# EAGLE board sdcard (EAGLE 6.5.0)
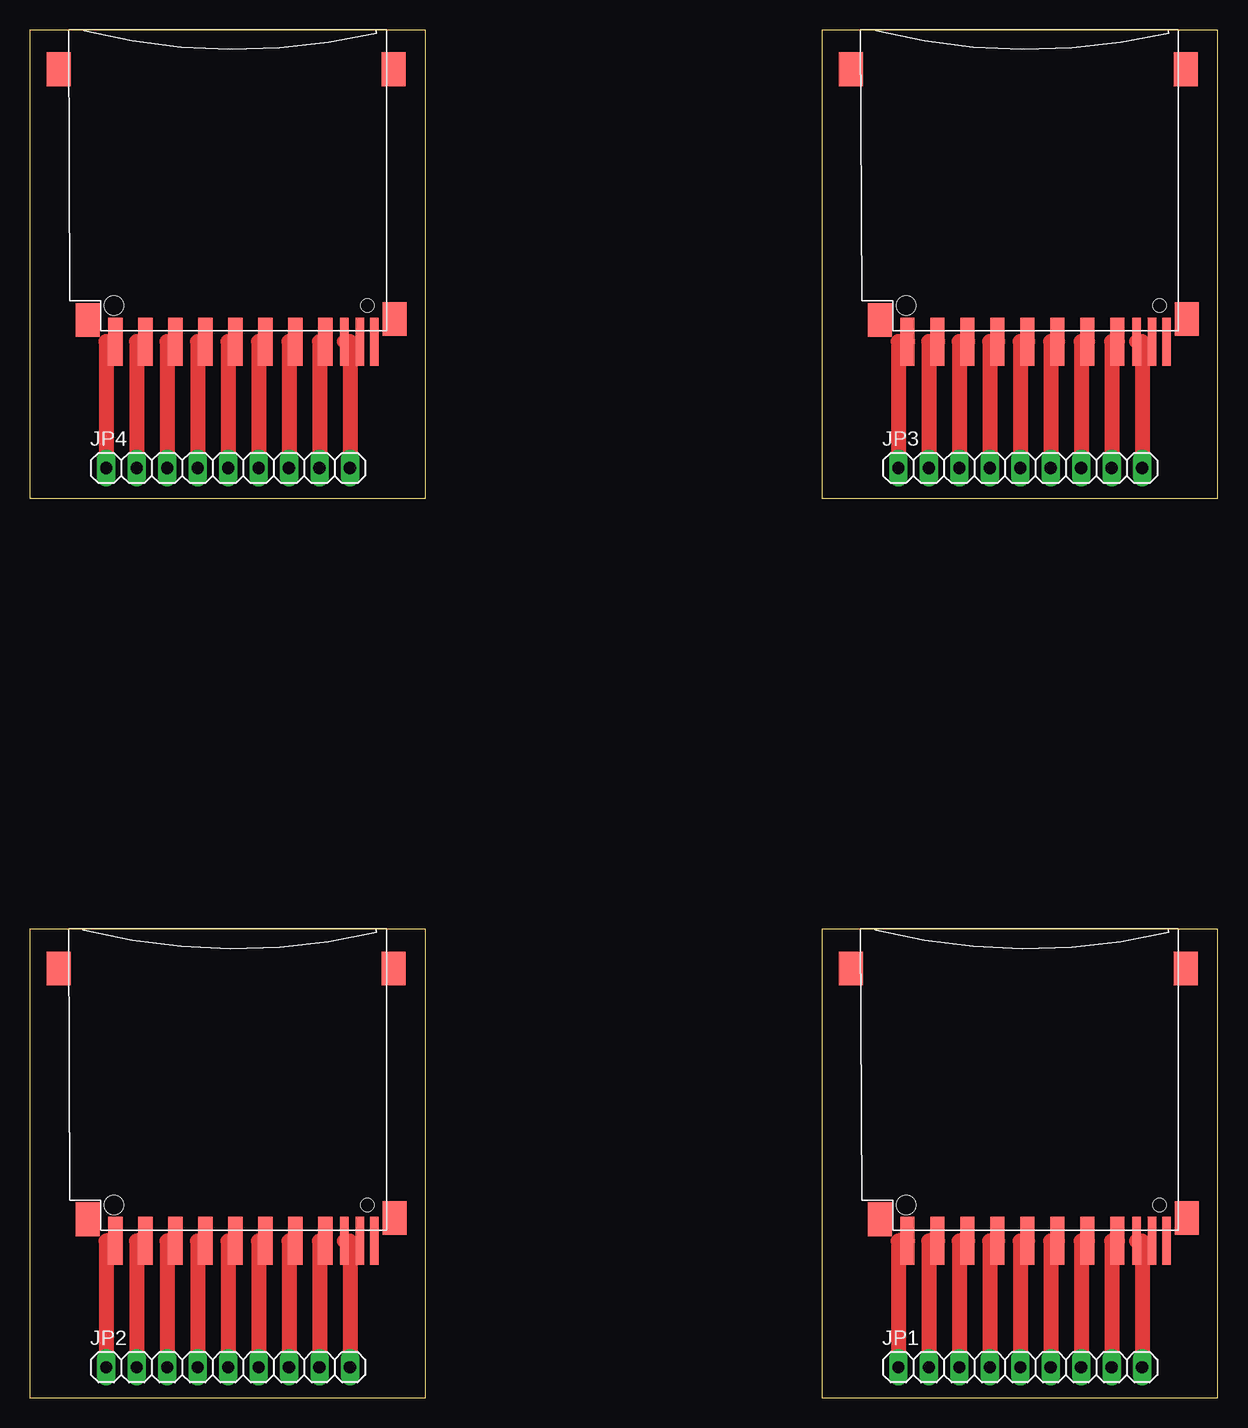
[diagram p0: board, top side]

Size 99.04 x 113.97 mm. Coordinates in mm from the lower left corner, seen from the top.
Outline: 66.04,0 99.04,0 99.04,39.04 66.04,39.04 66.04,0
Outline: 0,0 33,0 33,39.04 0,39.04 0,0
Outline: 66.04,74.93 99.04,74.93 99.04,113.97 66.04,113.97 66.04,74.93
Outline: 0,74.93 33,74.93 33,113.97 0,113.97 0,74.93
Copper layers (1*16): Top 0.035mm / dielectric 1.5mm / Bottom 0.035mm
Design rules "default": minimum track width 10mil, minimum drill 24mil, track to track 8mil, track to pad 8mil, pad to pad 8mil, via to via 8mil, smd to smd 8mil, copper to edge 40mil, drill to drill 8mil, minimum pad ring 10mil, minimum via ring 8mil, stop-mask expansion 4mil, vias tented up to drill 0mil, thermal gap 10mil

## Footprints (pad centres in the part's own frame; a part is rotated, then mirrored left to right if it is on the bottom)
1X09 = drill 1.016 long: 1 -10.16,0; 2 -7.62,0; 3 -5.08,0; 4 -2.54,0; 5 0,0; 6 2.54,0; 7 5.08,0; 8 7.62,0; 9 10.16,0
06132 = smd 1.2 x 4: 1 6.9,0.9; 2 4.4,0.9; 3 1.9,0.9; 4 -0.6,0.9; 5 -3.1,0.9; 6 -5.6,0.9; 7 -8.1,0.9; 9 9.4,0.9 | smd 0.7 x 4: 8 -9.7,0.9; CD -11,0.9; WP -12.2,0.9 | smd 2 x 2.8: GP -13.8,-21.8; GP2 14.1,-21.8; GP3 11.7,-0.9; GP4 -13.9,-1 | hole 1.1: -11.6,-2.1 | hole 1.6: 9.5,-2.1

## Placement (x,y rotation side)
JP1  [1X09]  82.55,2.54 0 top
JP2  [1X09]  16.51,2.54 0 top
JP3  [1X09]  82.55,77.47 0 top
JP4  [1X09]  16.51,77.47 0 top
U$1  SDMMC06132  [06132]  82.55,13.97 180 top
U$2  SDMMC06132  [06132]  16.51,13.97 180 top
U$3  SDMMC06132  [06132]  82.55,88.9 180 top
U$4  SDMMC06132  [06132]  16.51,88.9 180 top

## Library data of the parts
JP1-JP4 = pinhead
U$1-U$4 = adafruit

## Nets
N$1: JP1.2 U$1.1
N$2: JP1.1 U$1.9
N$3: JP1.3 U$1.2
N$4: JP1.6 U$1.5
N$5: JP1.8 U$1.7
N$6: JP1.9 U$1.8
N$7: JP2.2 U$2.1
N$8: JP2.1 U$2.9
N$9: JP2.3 U$2.2
N$10: JP2.6 U$2.5
N$11: JP2.8 U$2.7
N$12: JP2.9 U$2.8
N$13: JP3.2 U$3.1
N$14: JP3.1 U$3.9
N$15: JP3.3 U$3.2
N$16: JP3.6 U$3.5
N$17: JP3.8 U$3.7
N$18: JP3.9 U$3.8
N$19: JP4.2 U$4.1
N$20: JP4.1 U$4.9
N$21: JP4.3 U$4.2
N$22: JP4.6 U$4.5
N$23: JP4.8 U$4.7
N$24: JP4.9 U$4.8
VDD: JP1.5 U$1.4
VDD1: JP2.5 U$2.4
VDD2: JP3.5 U$3.4
VDD3: JP4.5 U$4.4
VSS1: JP1.4 U$1.3
VSS2: JP1.7 U$1.6
VSS3: JP2.4 U$2.3
VSS4: JP2.7 U$2.6
VSS5: JP3.4 U$3.3
VSS6: JP3.7 U$3.6
VSS7: JP4.4 U$4.3
VSS8: JP4.7 U$4.6

## Tracks (layer width: path | path; a pad name or v marks a point on that pad's centre or on a via)
N$1
  Top 1.27: U$1.1 74.93,13.07 JP1.2
N$2
  Top 1.27: U$1.9 72.39,13.07 JP1.1
N$3
  Top 1.27: U$1.2 77.47,13.07 JP1.3
N$4
  Top 1.27: U$1.5 85.09,13.07 JP1.6
N$5
  Top 1.27: U$1.7 90.17,13.07 JP1.8
N$6
  Top 1.27: U$1.8 92.71,13.07 JP1.9
N$7
  Top 1.27: U$2.1 8.89,13.07 JP2.2
N$8
  Top 1.27: U$2.9 6.35,13.07 JP2.1
N$9
  Top 1.27: U$2.2 11.43,13.07 JP2.3
N$10
  Top 1.27: U$2.5 19.05,13.07 JP2.6
N$11
  Top 1.27: U$2.7 24.13,13.07 JP2.8
N$12
  Top 1.27: U$2.8 26.67,13.07 JP2.9
N$13
  Top 1.27: U$3.1 74.93,88 JP3.2
N$14
  Top 1.27: U$3.9 72.39,88 JP3.1
N$15
  Top 1.27: U$3.2 77.47,88 JP3.3
N$16
  Top 1.27: U$3.5 85.09,88 JP3.6
N$17
  Top 1.27: U$3.7 90.17,88 JP3.8
N$18
  Top 1.27: U$3.8 92.71,88 JP3.9
N$19
  Top 1.27: U$4.1 8.89,88 JP4.2
N$20
  Top 1.27: U$4.9 6.35,88 JP4.1
N$21
  Top 1.27: U$4.2 11.43,88 JP4.3
N$22
  Top 1.27: U$4.5 19.05,88 JP4.6
N$23
  Top 1.27: U$4.7 24.13,88 JP4.8
N$24
  Top 1.27: U$4.8 26.67,88 JP4.9
VDD
  Top 1.27: U$1.4 82.55,13.07 JP1.5
VDD1
  Top 1.27: U$2.4 16.51,13.07 JP2.5
VDD2
  Top 1.27: U$3.4 82.55,88 JP3.5
VDD3
  Top 1.27: U$4.4 16.51,88 JP4.5
VSS1
  Top 1.27: U$1.3 80.01,13.07 JP1.4
VSS2
  Top 1.27: U$1.6 87.63,13.07 JP1.7
VSS3
  Top 1.27: U$2.3 13.97,13.07 JP2.4
VSS4
  Top 1.27: U$2.6 21.59,13.07 JP2.7
VSS5
  Top 1.27: U$3.3 80.01,88 JP3.4
VSS6
  Top 1.27: U$3.6 87.63,88 JP3.7
VSS7
  Top 1.27: U$4.3 13.97,88 JP4.4
VSS8
  Top 1.27: U$4.6 21.59,88 JP4.7